# Altium PCB Charer_PCB.PcbDoc
Units mm, origin at the board's own origin, x right, y up, seen from the top; angles counter-clockwise.
Board outline 58.52 x 31.55 mm, 2 copper layers (Top Layer, Bottom Layer); 25 components, 10 nets, 59 pads, 49 vias.
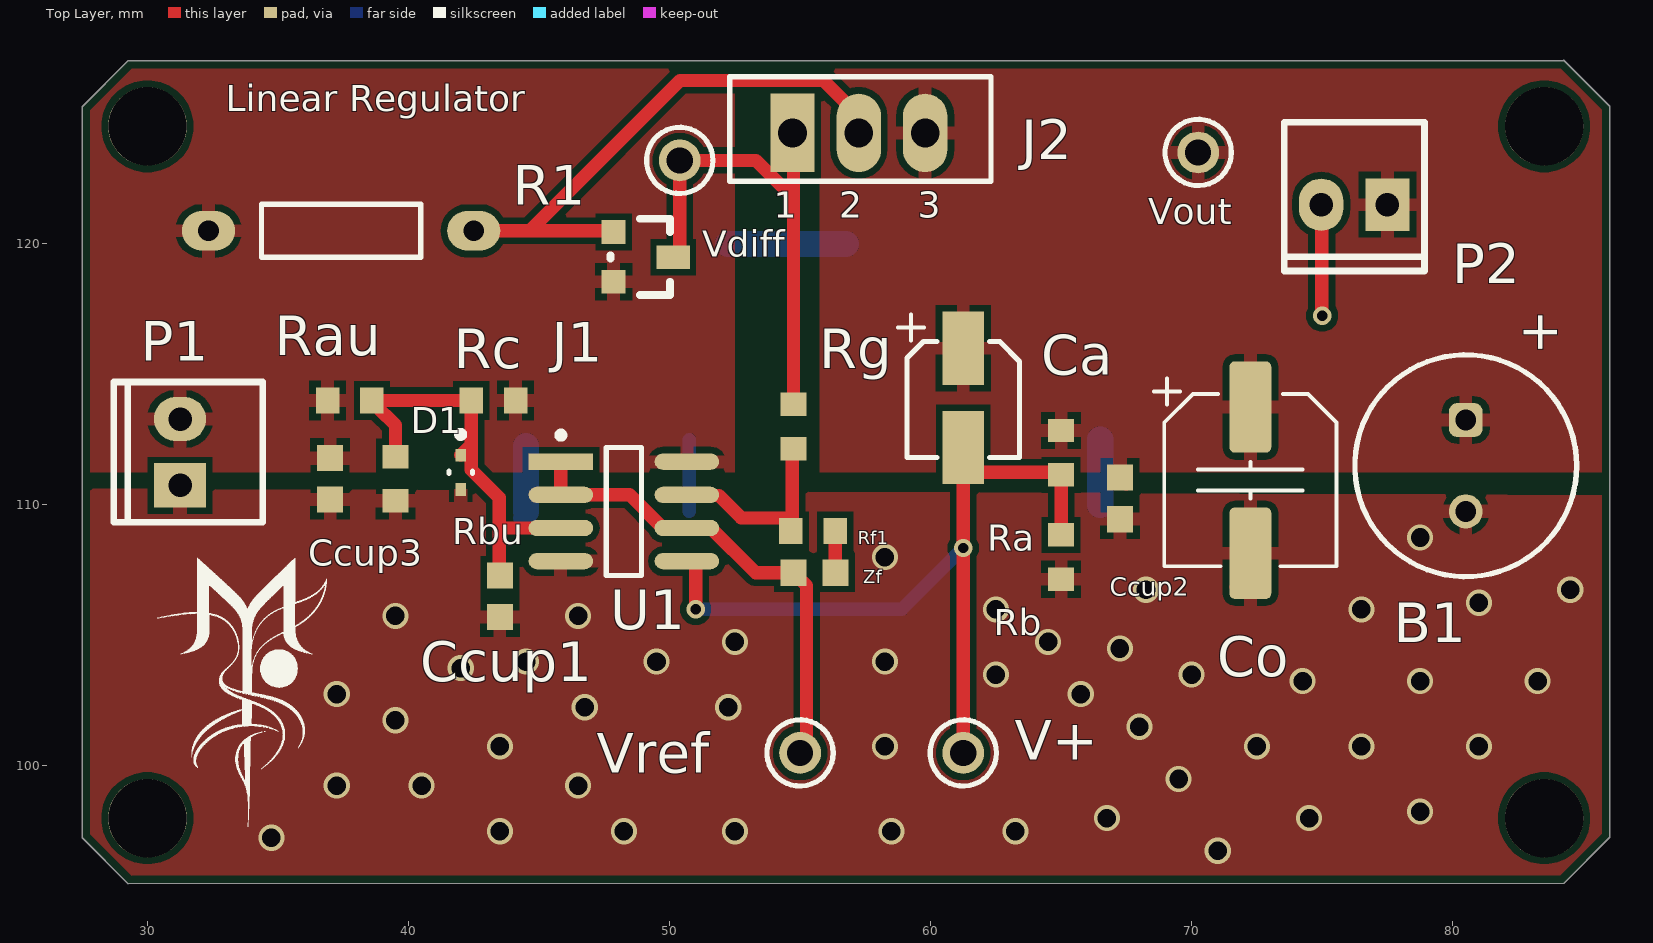
[diagram p0: Top Layer view]
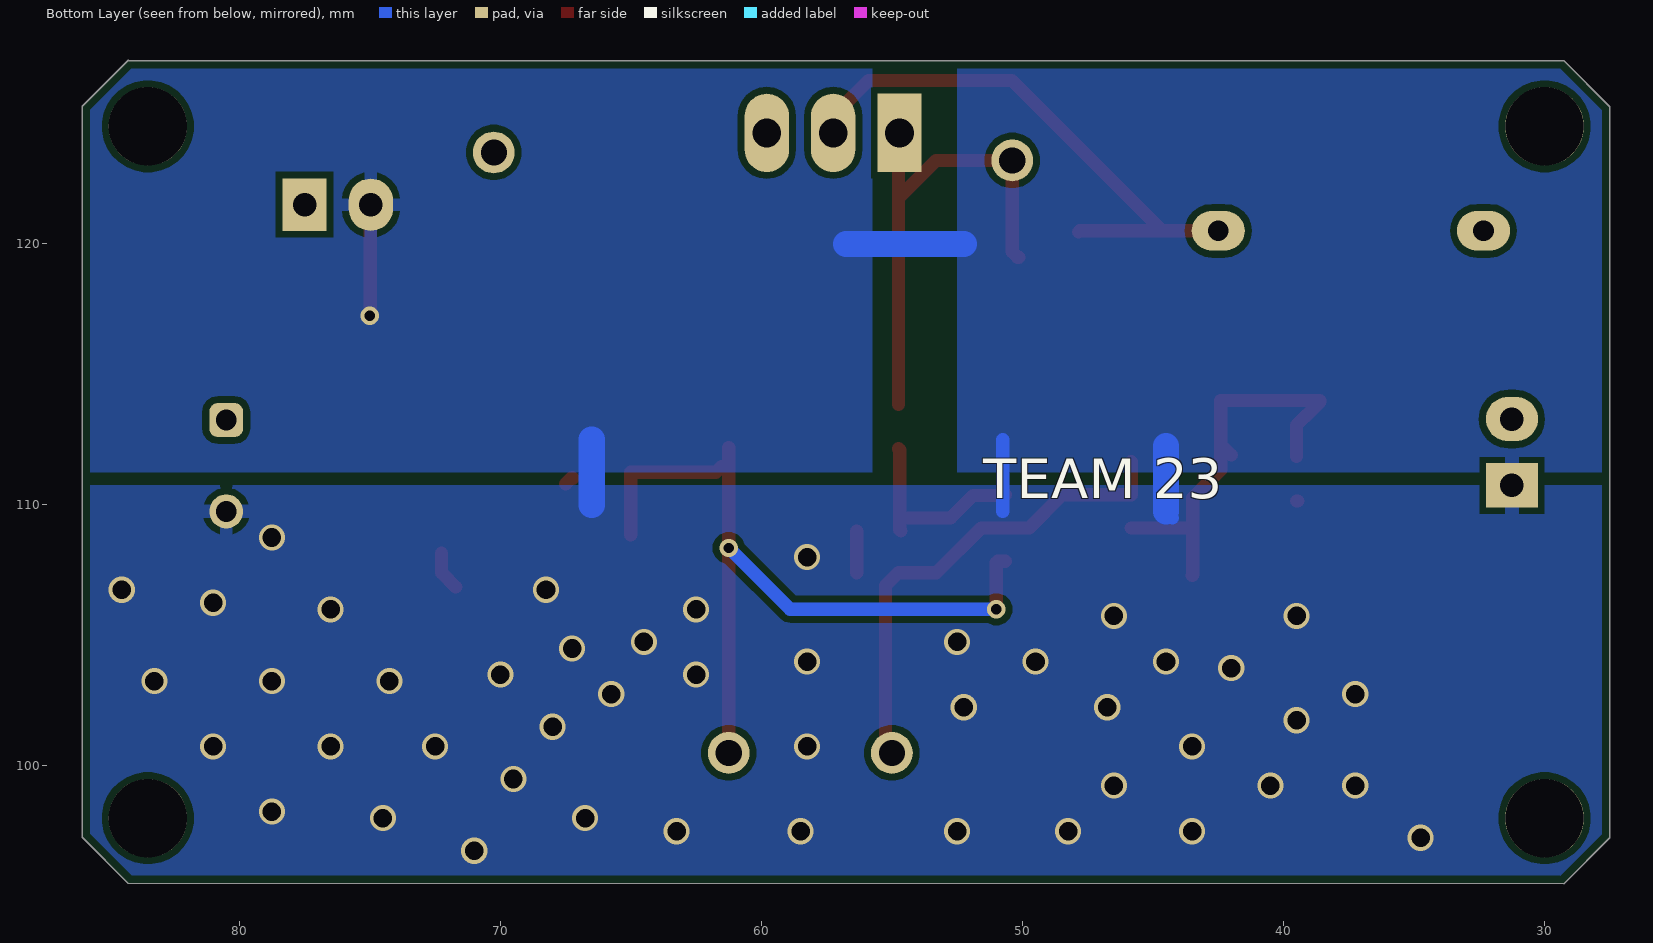
[diagram p1: Bottom Layer view, seen from below]

## Layer stack, top to bottom
Top Solder: solder mask 0.0102, Solder Resist, Dk 3.5
Top Layer: signal copper 0.0356
Dielectric 1: dielectric 0.32, FR-4, Dk 4.8
Bottom Layer: signal copper 0.0356
Bottom Solder: solder mask 0.0102, Solder Resist, Dk 3.5

## Board outline
29.268,95.482 27.5,97.25 27.5,125.25 29.268,127.018 84.232,127.018 84.25,127.036 86.018,125.268 86.018,97.268 84.25,95.5

## Design rules (kind name [scope] priority, off if disabled: settings)
BoardOutlineClearance [All] p1: gap=0.3 ignorepadtopadclearanceinfootprint=FALSE except(0.4: Arc-SplitBarrior Arc-SplitContinuation Track-SplitBarrior Track-SplitContinuation SMDPad-SplitBarrior SMDPad-SplitContinuation THPad-SplitBarrior THPad-SplitContinuation Via-SplitBarrior Via-SplitContinuation Fill-SplitBarrior Fill-SplitContinuation Poly-SplitBarrior Poly-SplitContinuation Region-SplitBarrior Region-SplitContinuation Text-SplitBarrior Text-SplitContinuation)
Clearance [All] p1: gap=0.254 ignorepadtopadclearanceinfootprint=TRUE
Height [All] p1: minheight=0 maxheight=50 prefheight=12.7
HoleSize [All] p1: absolutevalues=TRUE maxlimit=12 minlimit=0.25 maxpercent=80.000 minpercent=20.000
MinimumAnnularRing [All] p1: minimumring=0.13
MinimumSolderMaskSliver [All] p1: minsoldermaskwidth=0.102
PolygonConnect [All] p1: thpad.connectstyle=Relief thpad.reliefconductorwidth=0.508 thpad.reliefentries=4 thpad.polygonreliefangle="90 Angle" thpad.airgapwidth=0.254 smdpad.connectstyle=Relief smdpad.reliefconductorwidth=0.508 smdpad.reliefentries=4 smdpad.polygonreliefangle="90 Angle" smdpad.airgapwidth=0.254 via.connectstyle=Direct via.reliefconductorwidth=0.508 via.reliefentries=4 via.polygonreliefangle="90 Angle" via.airgapwidth=0.254
RoutingCorners [All] p1: cornerstyle=Round minsetback=2.54 maxsetback=2.54
RoutingVias [All] p1: holewidth=0.4 width=0.65 viastyle="Through Hole" minholewidth=0.25 minwidth=0.4 maxholewidth=1 maxwidth=2
SilkToSilkClearance [All] p1: silktosilkclearance=0.102
SilkToSolderMaskClearance [IsPad] p1: minsilkscreentomaskgap=0.102 clearancetoexposedcopper=TRUE
SolderMaskExpansion [All] p1: expansion=0.102 istentingtop=FALSE
SupplyNets "Schematic Supply Nets_2" [InNet('GND')] p1: voltage=0.000
SupplyNets "Schematic Supply Nets_1" [InNet('3.5V')] p2: voltage=0.000
SupplyNets "Schematic Supply Nets" [InNet('5V')] p3: voltage=0.000
Width [All] p1: maxlimit=10.16 minlimit=0.127 preferedwidth=0.508
24 further rules are at their usual default settings.

## Components (designator, comment, footprint, x,y, rotation, side; value= is the part's Value field where it differs from the comment)
B1 "860020474014" WCAP-ATG5_D8H11.5 80.5,111.5 r90 top
Ca "CAP000302" ECE-CAPAE4X5.4SM 61.25,114.1 r270 top value=4.7uF
Ccup1 "CAP000606" ECE-CAPC1608-0603SM 43.5,106.5 r270 top value=100pF
Ccup2 "CAP000606" ECE-CAPC1608-0603SM 67.25,110.25 r270 top value=100pF
Ccup3 "CAP000606" ECE-CAPC1608-0603SM 37,111 r270 top value=100pF
Co "CAP000306" ECE-CAPAE6.3X5.4SM 72.25,110.95 r270 top value=100uF
D1 "SZESD8351XV2T1G" FP-502-MFG 42,111.25 r270 top
J1 "BC807" ECE-SOT23SM 49,119.5 r270 top value=BC807-40,215
J2 "TRA000017" ECE-TO220ABTH 54.71,124.25 r0 top value=IRF4905
P1 "CON000001" ECE-600102STTH 31.25,110.75 r180 top value="2 Way"
P2 "CON000001" ECE-600102STTH 77.5,121.5 r270 top value="2 Way"
R1 "1.8" ECE-RESA0.4TH 32.336,120.492 r0 top
Ra "RES000138" ECE-RESC1608-0603SM 65,112 r270 top value=1k
Rau "RES000159" ECE-RESC1608-0603SM 37.75,114 r0 top value=56k
Rb "RES000138" ECE-RESC1608-0603SM 65,108 r270 top value=1k
Rbu "RES000155" ECE-RESC1608-0603SM 39.5,111 r270 top value=27k
Rc "12k" ECE-RESC1608-0603SM 43.25,114 r0 top
Rf1 "RES000138" ECE-RESC1608-0603SM 55.5,109 r0 top value=1k
Rg "RES000138" ECE-RESC1608-0603SM 54.75,113 r90 top value=1k
U1 "TLV9162IDR" SOIC8-Ti-Footprint 48.25,109.75 r0 top
V+ "TP_TH" Test-Pin-TH 61.25,100.5 r0 top
Vdiff "TP_TH" Test-Pin-TH 50.389,123.196 r90 top
Vout "TP_TH" Test-Pin-TH 70.25,123.5 r90 top
Vref "TP_TH" Test-Pin-TH 55,100.5 r90 top
Zf "CAP000609" ECE-CAPC1608-0603SM 55.55,107.4 r0 top value=330pF

## Footprints (in the part's own frame and the unit in brackets; to place one, negate y for a bottom-side part, rotate by r counter-clockwise, add the part's x,y. Pads: shape width x height; smd on the part's side, far side on the other; paste and mask are expansions set on the pad)
ECE-600102STTH [mm] "Polarised Header 2 way"
  rect 2x1.7 hole 0.9: 1(0,0)
  oval 2x1.7 hole 0.9: 2(0,-2.54)
  silkscreen extent -3.16,-3.96 2.54,1.42, body extent -3.3,-3.64 3.17,1.44, height 7.39
ECE-CAPAE4X5.4SM [mm] "Capacitor, polarized, aluminum can; 4x5.4mm DxH"
  rect 2.8x1.6 smd: 1(-1.9,0) 2(1.9,0)
  silkscreen extent -3.2,-2.5 2.29,2.16
ECE-CAPAE6.3X5.4SM [mm] "Capacitor, polarized, aluminum can; 6.3x5.4mm DxH"
  round 0.508 on Mech15: 0(0,0)
  rrect25% 3.5x1.6 smd: 1(-2.8,0) 2(2.8,0)
  silkscreen extent -3.9,-3.7 3.3,3.3, body extent -3.3,-3.3 3.3,3.3, height 4.23
ECE-CAPC1608-0603SM [mm] "Chip Capacitor, Body 1.6x0.8mm, IPC Medium Density"
  rect 1x1 smd: 1(-0.8,0) 2(0.8,0)
  body extent -0.87,-0.48 0.87,0.48, height 0.85
ECE-RESA0.4TH [mil] "Resistor Axial 10mm"
  oval 80x60 hole 31.5: 1(0.16,0.32) 2(400.16,0.32)
  silkscreen extent 80,-40 320,40, body extent -7,-47 417,47, height 95
ECE-RESC1608-0603SM [mm] "Chip Resistor, Body 1.6x0.8mm, IPC Medium Density"
  rect 0.9x1 smd: 1(-0.85,0) 2(0.85,0)
  body extent -0.85,-0.48 0.85,0.48, height 0.6
ECE-SOT23SM [mil] "SOT23 Medium Intensity"
  rect 36x36 smd: 1(-37.5,-45) 2(37.5,-45)
  rect 36x50 smd: 3(0.5,45)
  silkscreen extent -58,-50 58,40, body extent -57,-46 57,46, height 39
ECE-TO220ABTH [mm] "Transistor TO220"
  rect 1.7x3 hole 1.1: 1(0,0)
  oval 1.7x3 hole 1.1: 2(2.54,0) 3(5.08,0)
  silkscreen extent -2.4,-1.85 7.6,2.15
FP-502-MFG [mm]
  rect 0.48x0.4 smd paste+0 mask+0: 1(-0.66,0) 2(0.66,0)
  silkscreen extent -1.57,-0.45 0.05,0.45, body extent -1,-0.55 1,0.55, height 0.25
SOIC8-Ti-Footprint [mm]
  rect 2.469x0.622 smd paste+0 mask+0: 1(-2.414,1.905)
  rrect100% 2.469x0.622 smd paste+0 mask+0: 2(-2.414,0.635) 3(-2.414,-0.635) 4(-2.414,-1.905) 5(2.414,-1.905) 6(2.414,-0.635) 7(2.414,0.635) 8(2.414,1.905)
  silkscreen extent -2.54,-2.45 0.68,3.05, body extent -4.15,-2.95 4.15,2.95, height 0.25
Test-Pin-TH [mm]
  round 1.6 hole 1: 1(0,0)
  silkscreen extent -1.27,-1.27 1.27,1.27, body extent -1.27,-1.27 1.27,1.27, height 4.57
WCAP-ATG5_D8H11.5 [mm] "Aluminum Electrolytic Capacitors, 8x11.5mm"
  rrect50% 1.3x1.3 hole 0.8: 1(1.75,0)
  round 1.3 hole 0.8: 2(-1.75,0)
  silkscreen extent -4.25,-4.25 4.25,4.25, body extent -3.99,-4 4,4, height 11.81

## Part data
B1: library part CMP-03913-53914196-2, "Alum. Electrolytic Cap 470UF 25V 8MM Radial WCAP-ATG5, Lifetime 2000H +105OC", Capacitance=30F, Case/Package=Radial, Leakage Current=117.5µA, Max Operating Temperature=105°C, Min Operating Temperature=-40°C, Ripple Current=410mA, Tolerance=20%, Voltage Rating=25V, Diameter=8mm, Height=11.5mm, Lead Pitch=3.5mm, Length=11.5mm, Life (Hours)=2000hours, Pitch=3.5mm, REACH SVHC=Unknown, Voltage Rating (DC)=25V
Ca: library part CMP-039-000108-1, "CAP 4.7uF 35V ELE SM", Manufactuer=Nichicon, Manufacturer-PN=UWX1V4R7MCL1GB, Size/Package="4 X 5.4", Voltage/Current=35V, Assembly Method="Surface Mount", Category=Capacitor, Component Type=CAP-4X5.4-4.7uF-35V, Datasheet Link=http://share.engineering.auckland.ac.nz/ece/ts/Student%20Documents/SMT-Ecaps-e-wx.pdf, Item Type=Item, Path="ece/ts/Lists/Stock Inventory", Status=Active, Supplier1=Digikey, Supplier1-PN=493-2116-2-ND, UoA Stock#=CAP000302
Ccup1 Ccup2 Ccup3: library part CMP-039-000149-1, "CAP CER 100pF 50V NPO SM0603", Manufactuer=Samsung, Manufacturer-PN=CL10C101KB8NNNC, Size/Package="0603 (1608 Metric)", Voltage/Current=50V, Assembly Method="Surface Mount", Category=Capacitor, Component Type=CAP-0603-100pF, Item Type=Item, Path="ece/ts/Lists/Stock Inventory", Status=Active, Supplier1=Digikey, Supplier1-PN=1276-2167-2-ND, UoA Stock#=CAP000606
Co: library part CMP-039-000112-1, "CAP 100uF 16V ELE SM", Manufactuer=Nichicon, Manufacturer-PN=UWX1C101MCL1GB, Size/Package="6.3 X 5.4", Voltage/Current=16V, Assembly Method="Surface Mount", Category=Capacitor, Component Type=CAP-6.3X5.4-100uF-16V, Datasheet Link=http://share.engineering.auckland.ac.nz/ece/ts/Student%20Documents/SMT-Ecaps-e-wx.pdf, Item Type=Item, Path="ece/ts/Lists/Stock Inventory", Status=Active, Supplier1=Digikey, Supplier1-PN=493-2105-2-ND, UoA Stock#=CAP000306
D1: library part CMP-00278-47358907-1, "SZESD8351XV2T1G SZESD8351 Series 11.2 V 5 A Surface Mount ESD Protection Diode - SOD-523", Breakdown Voltage=5.5V, Capacitance=400fF, Case/Package=SOD, Clamping Voltage=8.2V, Manufacturer Lifecycle Status=ACTIVE, Max Junction Temperature (Tj)=125°C, Min Operating Temperature=-55°C, Peak Pulse Current=5A, Power Line Protection=No, Reverse Standoff Voltage=3.3V, Composition=Zener, Direction=Unidirectional, Element Configuration=Single, Height=700µm, Lead Free="Lead Free", Lifecycle Status=Production, Max Operating Temperature=125°C, Min Breakdown Voltage=5.5V, Mount="Surface Mount", NexarPartId=47358907, Number of Channels=1, Number of Pins=2, Number of Unidirectional Channels=1, Packaging="Tape & Reel (TR)", RoHS=Compliant, Working Voltage=3.3V
J1: library part CMP-053-000000-1, "TRANS PNP GP 500MA 45V SOT23", Manufactuer="NXP Semiconductors", Manufacturer-PN=BC807-40,215, Size/Package=SOT23, Voltage/Current=45V/500mA, Assembly Method="Surface Mount", Category=Transistor, Component Type=TRA-SOT23-BC807, Datasheet Link=http://share.engineering.auckland.ac.nz/ece/ts/Student%20Documents/BC807_BC807W_BC327.pdf, Item Type=Item, Path="ece/ts/Lists/Stock Inventory", Status=Active, Supplier1=Digikey, Supplier1-PN=568-1629-2-ND, UoA Stock#=TRA000025
J2: library part CMP-054-000016-1, "P-Type MOSFET IRF4905 TH", Manufactuer="International Rectifier", Manufacturer-PN=IRF4905PBF, Size/Package=TO220AB, Voltage/Current=55V/74A, Assembly Method="Through hole", Category=Transistor, Component Type=NA, Datasheet Link=http://share.engineering.auckland.ac.nz/ece/ts/Student%20Documents/IRF4905_MOSFET.pdf, Item Type=Item, Path="ece/ts/Lists/Stock Inventory", Status=Active, Supplier1="Arrow Components", Supplier1-PN=IRF4905, Supplier2="Element 14", Supplier2-PN=1298510, UoA Stock#=TRA000017
P1 P2: library part CMP-040-000000-1, "HEADER POLARISED 2WAY TH", Manufactuer=GTK, Manufacturer-PN=600102ST, Size/Package="2.54 Radial", Assembly Method="Through hole", Category=Connector, Component Type=NA, Datasheet Link=http://share.engineering.auckland.ac.nz/ece/ts/Student%20Documents/polarised_connectors.pdf, Item Type=Item, Path="ece/ts/Lists/Stock Inventory", Status=Active, Supplier1=Elecon, Supplier1-PN=YY3N02, Supplier2="Active Components", Supplier2-PN=600102ST, UoA Stock#=CON000001
R1: library part CMP-052-000003-1, "RES MF 1R8 TH", Size/Package="Axial 10mm", Voltage/Current=0.6W, Assembly Method="Through hole", Category=Resistor, Component Type=NA, Item Type=Item, Path="ece/ts/Lists/Stock Inventory", Status=Active, Supplier1="Active components", Supplier1-PN=T462164, UoA Stock#=RES000004
Ra Rb Rf1 Rg: library part CMP-052-000122-1, "RES CER 1K 1608 SM", Manufactuer=Panasonic, Manufacturer-PN=ERJ-3EKF1001V, Size/Package="1608 (0603)", Voltage/Current=1/10W, Assembly Method="Surface Mount", Category=Resistor, Component Type=RES-1608-1K, Datasheet Link=http://share.engineering.auckland.ac.nz/ece/ts/Student%20Documents/Panasonic-Resistors.pdf, Item Type=Item, Path="ece/ts/Lists/Stock Inventory", Status=Active, Supplier1=Digikey, Supplier1-PN=P1.00KHTR-ND, UoA Stock#=RES000138
Rau: library part CMP-052-000143-1, "RES CER 56K 1608 SM", Manufactuer=Panasonic, Manufacturer-PN=ERJ-3EKF5602V, Size/Package="1608 (0603)", Voltage/Current=1/10W, Assembly Method="Surface Mount", Category=Resistor, Component Type=RES-1608-56K, Datasheet Link=http://share.engineering.auckland.ac.nz/ece/ts/Student%20Documents/Panasonic-Resistors.pdf, Item Type=Item, Path="ece/ts/Lists/Stock Inventory", Status=Active, Supplier1=Digikey, Supplier1-PN=P56.0KHTR-ND, UoA Stock#=RES000159
Rbu: library part CMP-052-000139-1, "RES CER 27K 1608 SM", Manufactuer=Samsung, Manufacturer-PN=RC1608F273CS, Size/Package="1608 (0603)", Voltage/Current=1/10W, Assembly Method="Surface Mount", Category=Resistor, Component Type=RES-1608-27K, Datasheet Link=http://share.engineering.auckland.ac.nz/ece/ts/Student%20Documents/Samsung-CHIP_RESISTOR_150112_1.pdf, Item Type=Item, Path="ece/ts/Lists/Stock Inventory", Status=Active, Supplier1=Digikey, Supplier1-PN=1276-4781-2-ND, UoA Stock#=RES000155
Rc: library part CMP-052-000135-1, "RES CER 12K 1608 SM", Manufactuer=Rohm, Manufacturer-PN=MCR03ERTF1202, Size/Package="1608 (0603)", Voltage/Current=1/10W, Assembly Method="Surface Mount", Category=Resistor, Component Type=RES-1608-12K, Datasheet Link=http://share.engineering.auckland.ac.nz/ece/ts/Student%20Documents/Rohm-resistors.pdf, Item Type=Item, Path="ece/ts/Lists/Stock Inventory", Status=Active, Supplier1=Digikey, Supplier1-PN=RHM12.0KCLTR-ND, UoA Stock#=RES000151
U1: library part CMP-001-0004-1, "Dual 10pA 33V/us 11MHz SOIC-8 Operational Amplifier ROHS", Case/Package=SOIC
V+ Vdiff Vout Vref: library part CMP-00024-1, "Test pin TH generic"
Zf: library part CMP-039-000152-1, "CAP CER 330pF 50V X7R SM0603", Manufactuer=Yageo, Manufacturer-PN=CC0603KRX7R9BB331, Size/Package="0603 (1608 Metric)", Voltage/Current=50V, Assembly Method="Surface Mount", Category=Capacitor, Component Type=CAP-0603-330pF, Item Type=Item, Path="ece/ts/Lists/Stock Inventory", Status=Active, Supplier1=Digikey, Supplier1-PN=311-1186-2-ND, UoA Stock#=CAP000609

## Free pads (board coordinates)
  round 3 hole 3 unplated: 2(30,98) 2(30,124.5) 2(83.5,98) 2(83.5,124.5)

## Via types
v1: diameter 1, hole 0.711, Top Layer to Bottom Layer, 46 vias
v2: diameter 0.7, hole 0.4, Top Layer to Bottom Layer, 3 vias

## Nets (pads, with @x,y where several pads share a name; then routed paths per layer and width w, separated by ;. In a path a pad name is that pad's centre, name@x,y a point inside that pad or via, vN(x,y) a via of type N, cw(c..) or ccw(c..) an arc to the next point about the centre after c; other vN are vias at no path point)
3.5V: B1.1 Ca.1 Ccup2.1 Co.1 J2.3 P2.1 Ra.1 Vout.1 | length 0.9
  Top Layer w0.508: Ccup2.1@67.225,111.025 Ccup2.1 Ccup2.1@67.496,110.804 ; Vout.1@69.899,123.851 Vout.1
5V: Ccup3.1 J1.2 P1.2 R1.1 Rau.1 Rc.2 U1.8 | length 0.1
  Top Layer w0.508: P1.2 P1.2@31.4,113.29
GND: B1.2 Ccup1.2 Ccup2.2 Ccup3.2 Co.2 D1.2 P1.1 P2.2 Rb.2 Rbu.2 U1.4 | length 18.4
  Top Layer w0.508: Rbu.2@39.45,110.15 Rbu.2 ; Co.2@71.704,106.854 72.25,107.4 Co.2 ; P2.2 74.98,121.48 74.98,117.27 v2(75,117.25)
  Bottom Layer w0.508: 44.25,109.5 44.5,109.75 ; 50.75,109.75 50.75,112.5
  Bottom Layer w1: 44.5,109.75 44.5,112.25 ; 52.25,120 56.75,120 ; 66.5,110 66.5,112.5
  other v1: 71,96.75 34.75,97.25 43.5,97.5 48.25,97.5 52.5,97.5 58.5,97.5 63.25,97.5 66.75,98 74.5,98 78.75,98.25 37.25,99.25 40.5,99.25 46.5,99.25 69.5,99.5 43.5,100.75 58.25,100.75 72.5,100.75 76.5,100.75 81,100.75 68,101.5 39.5,101.75 46.75,102.25 52.25,102.25 37.25,102.75 65.75,102.75 74.25,103.25 78.75,103.25 83.25,103.25 62.5,103.5 70,103.5 42,103.75 44.5,104 49.5,104 58.25,104 67.25,104.5 52.5,104.75 64.5,104.75 39.5,105.75 46.5,105.75 62.5,106 76.5,106 81,106.25 68.25,106.75 84.5,106.75 58.25,108 78.75,108.75
NetCcup1_1: Ccup1.1 D1.1 Rau.2 Rbu.1 Rc.1 U1.3 | length 16.4
  Top Layer w0.508: Rbu.1 39.5,113.062 39.167,113.395 39.155,113.395 38.6,113.95 Rau.2 Rc.1 42.4,112.31 ; D1.1 42.4,112.31 ; Ccup1.1 43.475,107.325 43.475,109.115 ; U1.3 43.475,109.115 ; 42.4,112.31 42.4,111.348 43.475,110.273 43.475,109.115
NetJ1_1: J1.1 J2.2 R1.2 | length 21.7
  Top Layer w0.508: R1.2 44.5,120.5 ; J1.1 47.81,120.5 44.5,120.5 ; J2.2 57.25,124.9 55.892,126.258 50.408,126.258 44.65,120.5 44.5,120.5
NetRf1_1: Rf1.1 Rg.1 U1.7 | length 7.5
  Top Layer w0.508: U1.7 50.685,110.363 51.887,110.363 52.75,109.5 Rf1.1@54.65,109.5 ; Rf1.1 54.7,109.05 54.7,112.1 Rg.1
NetRf1_2: Rf1.2 Zf.2 | length 1.6
  Top Layer w0.508: Zf.2 Rf1.2
V+: Ca.2 Ra.2 Rb.1 U1.5 V+.1 | length 30.8
  Top Layer w0.508: U1.5 50.947,107.845 51,107.792 v2(51,106) ; V+.1 v2@61.25,108.261 ; v2(61.25,108.35) Ca.2 ; Ca.2@61.532,111.468 61.75,111.25 Ra.2@65,111.25 ; Rb.1 Ra.2
  Bottom Layer w0.508: v2(51,106) 58.9,106 v2(61.25,108.35)
Vdiff: J1.3 J2.1 Rg.2 Vdiff.1 | length 19.2
  Top Layer w0.508: J1.3 50.186,119.487 50.389,119.69 Vdiff.1 53.304,123.196 54.75,121.75 ; J2.1 54.75,124.21 54.75,121.75 ; Rg.2 54.75,121.75
Vref: U1.1 U1.2 U1.6 Vref.1 Zf.1 | length 18.5
  Top Layer w0.508: U1.1 U1.2 48.47,110.385 49.74,109.115 U1.6 51.587,109.115 53.302,107.4 Zf.1 55.25,106.9 55.25,101.045 Vref.1@54.852,100.648
pads on no net: Co.0

## Polygon pours and split planes (outlines as drawn)
5V on Top Layer "5V_L01_P001" (solid, remove dead copper, pour order 1): 27.5,125.25 27.5,111.25 52.5,111.25 52.5,127 29.25,127
GND on Top Layer "GND_L01_P002" (solid, remove dead copper, pour order 2): 27.746,110.625 27.746,97.396 29.496,95.646 84.496,95.646 86.246,97.396 86.246,110.375
3.5V on Top Layer "3.5V_L01_P004" (solid, remove dead copper, pour order 4): 55.75,127 55.75,111.25 86,111.25 86,125.25 84.25,127
GND on Bottom Layer "GND_L02_P006" (solid, pour order 6): 27.5,125.25 29.25,127 52.5,127 52.5,111.25 27.5,111.25
GND on Bottom Layer "GND_L02_P007" (solid, pour order 7): 55.75,127 84.25,127 86,125.25 86,111.25 55.75,111.25
GND on Bottom Layer "GND_L02_P008" (solid, pour order 8): 27.5,110.75 27.5,97.25 29.25,95.5 84.25,95.5 86,97.25 86,110.75

## Silkscreen, mask and mechanical layers (free items; w line width, h text height)
Top Overlay:
  drawing of 23 lines, arcs and shapes, not listed
  text "Linear Regulator" at 33.004,125.087 h1
Bottom Overlay:
  text "TEAM 23" at 51.496,110.254 h1.52
Mechanical 1:
  lines w0.254: 29.25,95.5 84.25,95.5 86.018,97.268 86.018,125.268 ; 29.268,95.482 27.5,97.25 27.5,125.25 29.268,127.018 84.232,127.018 ; 84.25,127.036 86.018,125.268 ; 85.982,125.268 86.018,125.268

## Text inside footprints (layer, text, board x,y; h text height)
B1: Top Overlay "+" at 84,115.75 h1.5 r90
J2: Top Overlay "1" at 54,121 h1; Top Overlay "2" at 56.5,121 h1; Top Overlay "3" at 59.5,121 h1